# Altium PCB CANTRICK.PcbDoc (part 2 of 2)
Units mm, origin at the board's own origin, x right, y up, seen from the top; angles counter-clockwise.
Board outline 87.25 x 92.48 mm, 2 copper layers (Top Layer, Bottom Layer); 104 components, 77 nets, 373 pads, 152 vias.
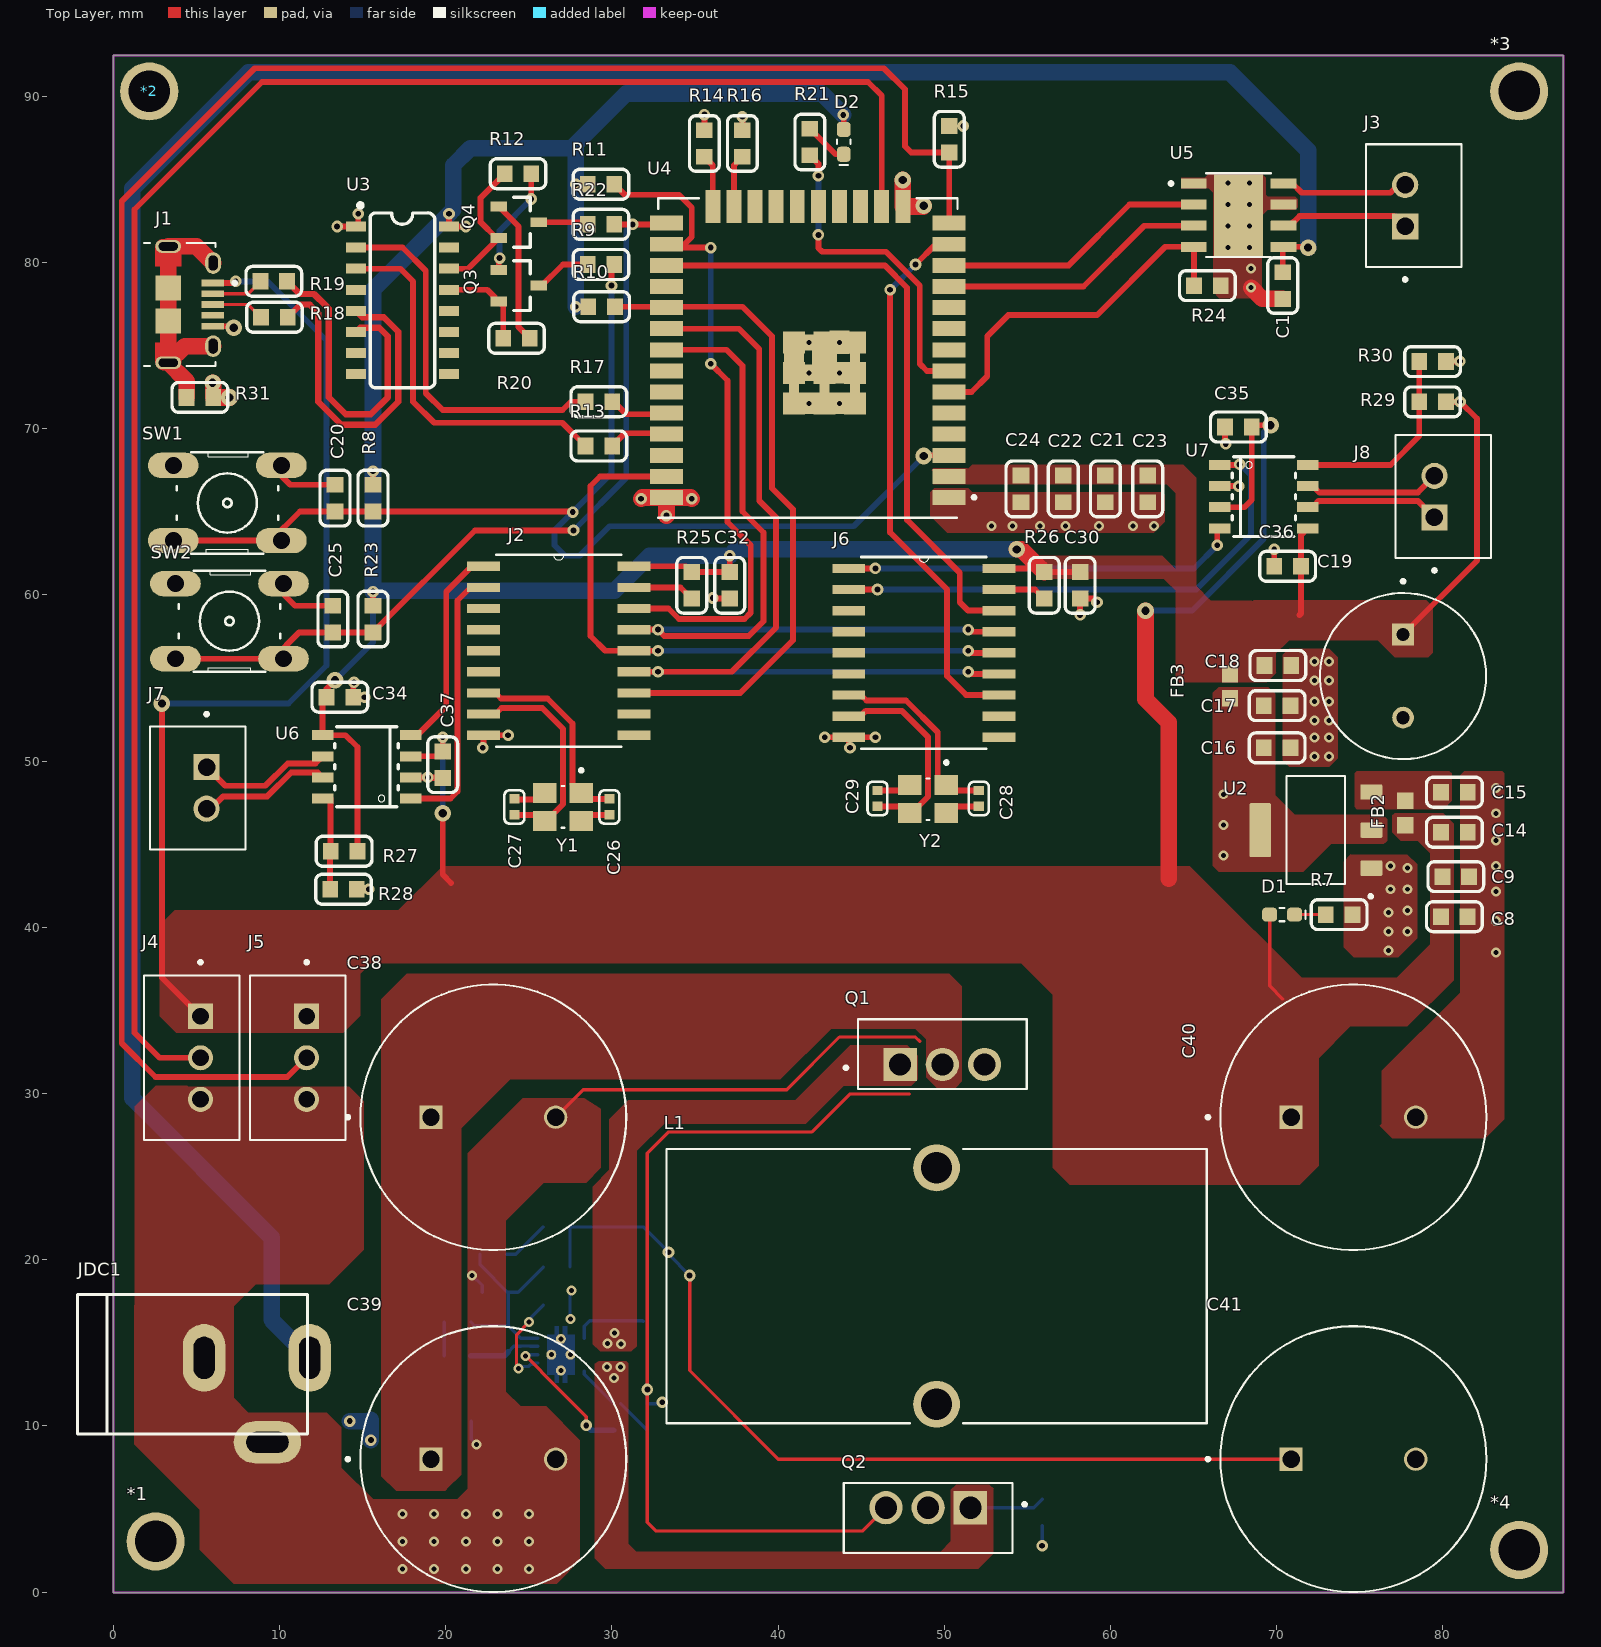
[diagram p0: Top Layer view]

## Via types
v1: diameter 0.6, hole 0.3, Top Layer to Bottom Layer, 74 vias
v2: diameter 0.7, hole 0.35, Top Layer to Bottom Layer, 65 vias
v3: diameter 1, hole 0.5, Top Layer to Bottom Layer, 13 vias

## Nets (pads, with @x,y where several pads share a name; then routed paths per layer and width w, separated by ;. In a path a pad name is that pad's centre, name@x,y a point inside that pad or via, vN(x,y) a via of type N, cw(c..) or ccw(c..) an arc to the next point about the centre after c; other vN are vias at no path point) (continued)
SCK_CAN: (continued)
  Bottom Layer w0.35: v2(32.766,55.372) v2(51.435,55.372)
SELECT1: R27.1 R28.2 U6.8 | length 5.9
  Top Layer w0.35: U6.8 13.073,47.752 13.073,44.585 R27.1 ; R28.2 R27.1@13.043,44.577
SELECT2: R29.1 R30.2 U7.8 | length 11.9
  Top Layer w0.35: U7.8 76.835,67.818 78.572,69.555 R29.1 78.572,74.038 R30.2
SW: C11.1 L1.1 Q1.3 Q2.2 U1.8
TX: R13.2 U3.3 | length 22.5
  Top Layer w0.35: U3.3 17.272,79.629 18.034,78.867 18.034,71.628 19.304,70.358 27.013,70.358 R13.2
VIN: C2.2 C38.P C39.P F1.2 FB1.1 Q1.2
VN: U4.5
VP: U4.4
pads on no net: *1.1 *2.1 *3.1 *4.1 J1.4 J2.3 J2.4 J2.5 J2.6 J2.10 J2.11 J6.3 J6.4 J6.5 J6.6 J6.10 J6.11 U3.4 U3.7 U3.8 U3.9 U3.10 U3.11 U3.12 U3.15 U4.8 U4.9 U4.10 U4.17 U4.18 U4.19 U4.20 U4.21 U4.22 U4.28 U4.32 U4.33 U4.36

## Polygon pours and split planes (outlines as drawn)
GND on Bottom Layer "GND_L02_P032" (solid, pour order 32): 79.754,31.573 75.899,35.428 75.899,37.622 75.833,37.622 73.831,39.624 10.668,39.624 10.658,39.634 1.387,39.634 0.508,40.513 0.508,87.122 5.588,92.202 80.645,92.202 86.106,86.741 86.106,31.765
GND on Bottom Layer "GND_L02_P016" (solid, remove dead copper, pour order 16): 77.141,36.576 85.217,36.576 86.106,35.687 86.106,8.382 78.232,0.508 7.239,0.508 5.207,2.54 5.207,4.826 1.143,8.89 1.143,17.526 2.286,18.669 6.858,18.669 7.493,18.034 7.493,12.065 8.89,10.668 15.494,10.668 16.129,10.033 16.129,6.096 16.51,5.715 23.749,5.715 25.781,7.747 25.781,10.975 26.148,11.342 26.148,15.845 26.883,16.58 26.883,18.159 27.236,18.512 28.107,18.512 28.352,18.267 28.352,16.784 27.849,16.281 27.849,12.918 28.194,12.573 41.994,12.573 47.566,7.001 47.566,3.886 48.277,3.175 74.676,3.175 75.946,4.445 75.946,35.381
+5V on Bottom Layer "+5V_L02_P014" (solid, pour order 14): 48.324,24.223 47.921,24.625 47.921,26.53 48.672,27.28 56.691,27.28 66.114,36.703 73.914,36.703 75.057,35.56 75.057,5.588 74.041,4.572 64.008,4.572 62.992,5.588 62.992,16.002 60.579,18.415 52.705,18.415 47.879,23.241 47.879,24.638
VIN on Bottom Layer "VIN_L02_P010" (solid, pour order 10): 16.129,35.687 17.653,37.211 50.292,37.211 51.039,36.464 51.039,31.296 50.275,30.532 49.314,30.532 48.87,30.975 48.87,33.268 48.483,33.655 42.994,33.655 40.191,30.852 23.574,30.852 21.971,29.249 21.971,26.543 16.129,26.543
SW on Bottom Layer "SW_L02_P009" (solid, pour order 9): 28.031,14.187 28.609,14.187 28.714,14.082 31.003,14.082 31.811,13.274 42.889,13.274 47.854,8.31 47.854,4.47 48.387,3.937 49.657,3.937 50.087,4.367 50.087,7.805 52.953,10.671 52.953,15.509 50.221,18.241 46.355,22.107 46.355,26.543 47.985,28.173 53.88,28.173 55.329,29.623 55.329,33.638 54.711,34.256 52.359,34.256 51.361,33.258 51.361,30.359 50.934,29.931 45.184,29.931 42.095,26.843 42.095,16.388 41.042,15.335 31.449,15.335 31.18,15.067 31.18,14.676 31.021,14.517 28.746,14.517 28.65,14.421 28.054,14.421 28.023,14.391
HDRV on Bottom Layer "HDRV_L02_P008" (solid, pour order 8): 28.051,14.651 30.78,14.651 30.861,14.732 30.861,15.875 30.734,16.002 29.845,16.002 28.812,14.969 28.029,14.969 27.985,14.925 27.985,14.662
LDRV on Bottom Layer "LDRV_L02_P007" (solid, pour order 7): 28.011,13.921 29.402,13.921 30.684,13.921 30.845,13.76 30.845,12.699 30.676,12.53 29.839,12.53 29.57,12.8 28.756,13.602 28.057,13.602 28.011,13.647
GND on Bottom Layer "GND_L02_P004" (solid, remove dead copper, pour order 4): 20.955,10.922 24.765,10.922 25.146,10.541 25.146,8.001 24.765,7.62 21.463,7.62 21.082,8.001 21.082,9.398 20.701,9.779 20.701,10.668
NetC3_2 on Bottom Layer "NETC3_2_L02_P003" (solid, pour order 3): 18.778,12.809 18.923,12.954 24.765,12.954 25.291,13.48 25.845,13.48 25.923,13.402 25.923,12.893 25.772,12.742 25.442,12.742 24.956,12.256 24.956,11.391 24.758,11.193 18.983,11.193 18.778,11.453
VIN on Bottom Layer "VIN_L02_P002" (solid, pour order 2): 20.701,6.731 20.066,6.096 17.907,6.096 17.272,6.731 17.272,10.668 16.51,11.43 14.478,11.43 14.351,11.557 14.351,12.7 14.605,12.954 15.621,12.954 16.129,13.462 16.129,29.337 17.145,30.353 20.955,30.353 21.971,29.337 21.971,26.543 21.336,25.908 20.066,25.908 18.288,24.13 18.288,13.462 18.542,13.208 18.542,11.176 20.701,9.017
+12V on Bottom Layer "+12V_L02_P000" (solid, pour order 0): 15.24,17.907 15.494,17.653 15.494,13.716 15.113,13.335 14.097,13.335 13.462,12.7 13.462,11.557 13.335,11.43 9.525,11.43 9.017,11.938 9.017,17.272 9.652,17.907
GND on Top Layer "GND_L01_P034" (solid, pour order 34): 70.358,56.388 70.358,50.038 70.739,49.657 73.152,49.657 73.66,50.165 73.66,56.261 73.152,56.769 70.739,56.769
D3V3 on Top Layer "D3V3_L01_P033" (solid, pour order 33): 68.482,59.661 68.511,59.69 78.994,59.69 79.375,59.309 79.375,56.515 79.121,56.261 77.089,56.261 76.073,57.277 70.739,57.277 69.85,56.388 69.342,56.388
D3V3 on Top Layer "D3V3_L01_P031" (solid, pour order 31): 64.072,60.078 63.19,60.96 55.753,60.96 55.499,61.214 55.499,62.103 55.753,62.357 63.119,62.357 64.262,61.214
GND on Top Layer "GND_L01_P030" (solid, pour order 30): 64.262,84.455 65.913,84.455 66.167,84.201 66.167,78.232 66.548,77.851 68.834,77.851 69.088,78.105 69.088,82.804 69.469,83.185 71.12,83.185 71.247,83.312 71.247,83.82 71.12,83.947 69.469,83.947 69.342,84.074 69.342,85.09 69.088,85.344 65.913,85.344 65.659,85.09 64.262,85.09
GND on Top Layer "GND_L01_P029" (solid, pour order 29): 63.246,66.04 63.119,66.167 51.689,66.167 51.435,66.421 49.403,66.421 49.149,66.167 49.149,64.77 50.165,63.754 62.611,63.754 63.246,64.389
GND on Top Layer "GND_L01_P028" (solid, pour order 28): 4.455,30.467 4.513,30.409 14.183,30.409 15.051,29.54 15.051,20.595 12.996,18.539 8.566,18.539 7.235,17.208 7.235,11.591 4.976,9.333 1.3,9.333 1.3,29.24 2.54,30.48
+5V on Top Layer "+5V_L01_P027" (solid, pour order 27): 72.517,27.559 72.517,35.941 64.77,43.688 19.812,43.688 17.145,41.021 3.683,41.021 2.794,40.132 2.794,34.639 3.785,33.648 13.836,33.648 14.859,34.671 14.859,37.211 15.494,37.846 54.61,37.846 56.515,35.941 56.515,25.527 57.531,24.511 71.374,24.511 72.522,25.659
D3V3 on Top Layer "D3V3_L01_P026" (solid, pour order 26): 66.675,54.749 69.399,54.749 69.968,55.318 69.95,55.336 69.95,58.193 68.482,59.661 66.035,59.661 65.151,60.545 65.151,67.056 64.377,67.83 51.671,67.83 51.422,67.581 51.387,67.617 49.34,67.617 49.233,67.51 49.322,67.421 49.322,66.656 63.392,66.656 63.934,66.114 63.934,54.938 64.149,54.723
3V3 on Top Layer "3V3_L01_P025" (solid, pour order 25): 76.553,45.127 76.642,45.216 76.642,46.498 76.357,46.782 71.069,46.782 69.912,47.94 69.912,54.04 69.497,54.455 66.494,54.455 66.138,54.099 66.138,43.717 66.509,43.346 71.604,43.346 73.277,45.02 76.446,45.02
HDRV on Top Layer "HDRV_L01_P024" (solid, pour order 24): 31.174,14.484 29.282,14.484 28.841,14.926 28.841,24.396 29.845,25.4 29.845,28.448 30.988,29.591 41.021,29.591 44.323,32.893 47.752,32.893 48.387,32.258 48.387,30.861 48.006,30.48 43.942,30.48 41.656,28.194 33.147,28.194 31.496,26.543 31.496,14.808 31.196,14.509
GND on Top Layer "GND_L01_P023" (solid, pour order 23): 74.516,44.381 77.843,44.381 78.439,43.785 78.439,39.339 77.306,38.206 74.632,38.206 74.022,38.816 74.022,43.959 74.458,44.395
NetC15_2 on Top Layer "NETC15_2_L01_P022" (solid, pour order 22): 80.01,47.117 78.359,47.117 74.803,47.117 74.676,47.244 74.676,49.276 74.803,49.403 80.391,49.403 80.518,49.276 80.518,47.625
GND on Top Layer "GND_L01_P021" (solid, pour order 21): 79.629,27.305 76.962,27.305 76.2,28.067 76.327,28.194 76.327,31.369 81.026,36.068 81.026,49.149 81.28,49.403 83.566,49.403 83.693,49.276 83.693,28.448 82.55,27.305
+5V on Top Layer "+5V_L01_P019" (solid, remove dead copper, pour order 19): 69.469,27.178 68.961,27.686 68.961,36.068 69.85,36.957 77.216,36.957 79.248,38.989 79.248,44.45 78.486,45.212 77.47,45.212 76.962,45.72 76.962,46.736 77.089,46.863 80.01,46.863 80.645,46.228 80.645,36.83 77.851,34.036 74.422,34.036 72.517,32.131 72.517,27.559 72.136,27.178
GND on Top Layer "GND_L01_P018" (solid, pour order 18): 28.321,29.718 24.638,29.718 21.336,26.416 21.336,6.223 20.701,5.588 15.621,5.588 13.716,7.493 13.716,9.906 12.827,10.795 8.128,10.795 7.239,11.684 7.239,17.272 6.35,18.161 2.159,18.161 1.27,17.272 1.27,8.89 5.207,4.953 5.207,2.54 7.239,0.508 26.67,0.508 28.067,1.905 28.067,9.144 26.035,11.176 24.511,11.176 23.622,12.065 23.622,22.352 25.908,24.638 28.448,24.638 29.337,25.527 29.337,29.083
VIN on Top Layer "VIN_L01_P013" (solid, pour order 13): 20.063,6.189 20.063,6.224 20.916,7.077 20.916,27.901 23.876,30.861 40.132,30.861 43.18,33.909 48.26,33.909 48.895,33.274 48.895,30.988 49.53,30.353 50.673,30.353 51.054,30.734 51.054,36.449 50.292,37.211 17.653,37.211 16.129,35.687 16.129,6.985 17.018,6.096 20.066,6.096
LDRV on Top Layer "LDRV_L01_P012" (solid, pour order 12): 29.215,13.891 30.869,13.891 30.993,13.767 30.993,2.916 31.468,2.441 49.769,2.441 50.396,3.068 50.396,6.162 50.703,6.468 52.714,6.468 52.959,6.223 52.932,6.196 52.932,2.301 52.026,1.395 29.59,1.398 28.96,2.028 28.96,13.733
+5V on Bottom Solder "NONET_L02_P036" (solid, pour order 36): 47.921,26.53 48.672,27.28 56.691,27.28 66.114,36.703 73.914,36.703 75.057,35.56 75.057,5.588 74.041,4.572 64.008,4.572 62.992,5.588 62.992,16.002 60.579,18.415 52.705,18.415 47.879,23.241 47.921,23.283
SW on Bottom Solder "NONET_L-01_P-001" (solid): 53.848,28.194 48.006,28.194 46.355,26.543 46.355,22.098 52.959,15.494 52.959,10.668 50.038,7.747 50.038,6.731 48.133,6.731 47.879,6.985 47.879,8.382 42.164,14.097 42.164,26.924 45.085,29.845 50.927,29.845 51.435,30.353 55.372,30.353 55.372,29.591
VIN on Bottom Solder "NONET_L02_P035" (solid, pour order 35): 16.891,7.112 17.907,6.096 20.066,6.096 20.701,6.731 20.701,9.017 18.542,11.176 18.542,13.208 18.288,13.462 18.288,24.13 20.066,25.908 21.336,25.908 21.971,26.543 21.971,29.337 22.059,29.337 23.574,30.852 40.191,30.852 42.994,33.655 48.483,33.655 48.483,36.861 48.133,37.211 17.653,37.211 16.129,35.687 16.129,13.97 16.891,13.208
+5V on Bottom Paste "+5V_L02_P037" (solid, pour order 37): 48.324,24.223 47.921,24.625 47.921,26.53 48.672,27.28 56.691,27.28 66.114,36.703 73.914,36.703 75.057,35.56 75.057,5.588 74.041,4.572 64.008,4.572 62.992,5.588 62.992,16.002 60.579,18.415 52.705,18.415 47.879,23.241 47.879,24.638
SW on Bottom Paste "NONET_L-01_P-001" (solid): 53.736,28.234 47.894,28.234 46.243,26.583 46.243,22.138 52.847,15.534 52.847,10.708 49.926,7.787 49.926,6.771 48.021,6.771 47.767,7.025 47.767,8.422 42.052,14.137 42.052,26.964 44.973,29.885 50.815,29.885 51.323,30.393 55.26,30.393 55.26,29.631
VIN on Bottom Paste "NONET_L02_P035" (solid): 16.891,7.115 17.901,6.105 20.06,6.105 20.695,6.74 20.695,9.026 18.536,11.185 18.536,13.217 18.282,13.471 18.282,24.139 20.06,25.917 21.965,27.822 21.965,29.346 22.053,29.346 23.568,30.861 40.186,30.861 42.988,33.664 48.477,33.664 48.477,36.87 48.127,37.22 17.647,37.22 16.123,35.696 16.123,13.979 16.891,13.211

## Keep-outs
Keep-Out Layer:
  lines w0.127: 0,-0.023 0,92.456 87.249,92.456 87.249,-0.023 0.091,-0.023 0,-0.023

## Text inside footprints (layer, text, board x,y; h text height)
SW1: Top Assembly "4" at 3.299,68.329 h0.8 r180; Top Assembly "3" at 11.434,68.328 h0.8 r180; Top Assembly "2" at 3.297,64.006 h0.8 r180; Top Assembly "1" at 11.179,63.88 h0.8 r180
SW2: Top Assembly "1" at 11.306,56.768 h0.8 r180; Top Assembly "2" at 3.424,56.894 h0.8 r180; Top Assembly "3" at 11.561,61.216 h0.8 r180; Top Assembly "4" at 3.426,61.217 h0.8 r180